# EAGLE board PCB_V0.3 (EAGLE 9.7.0)
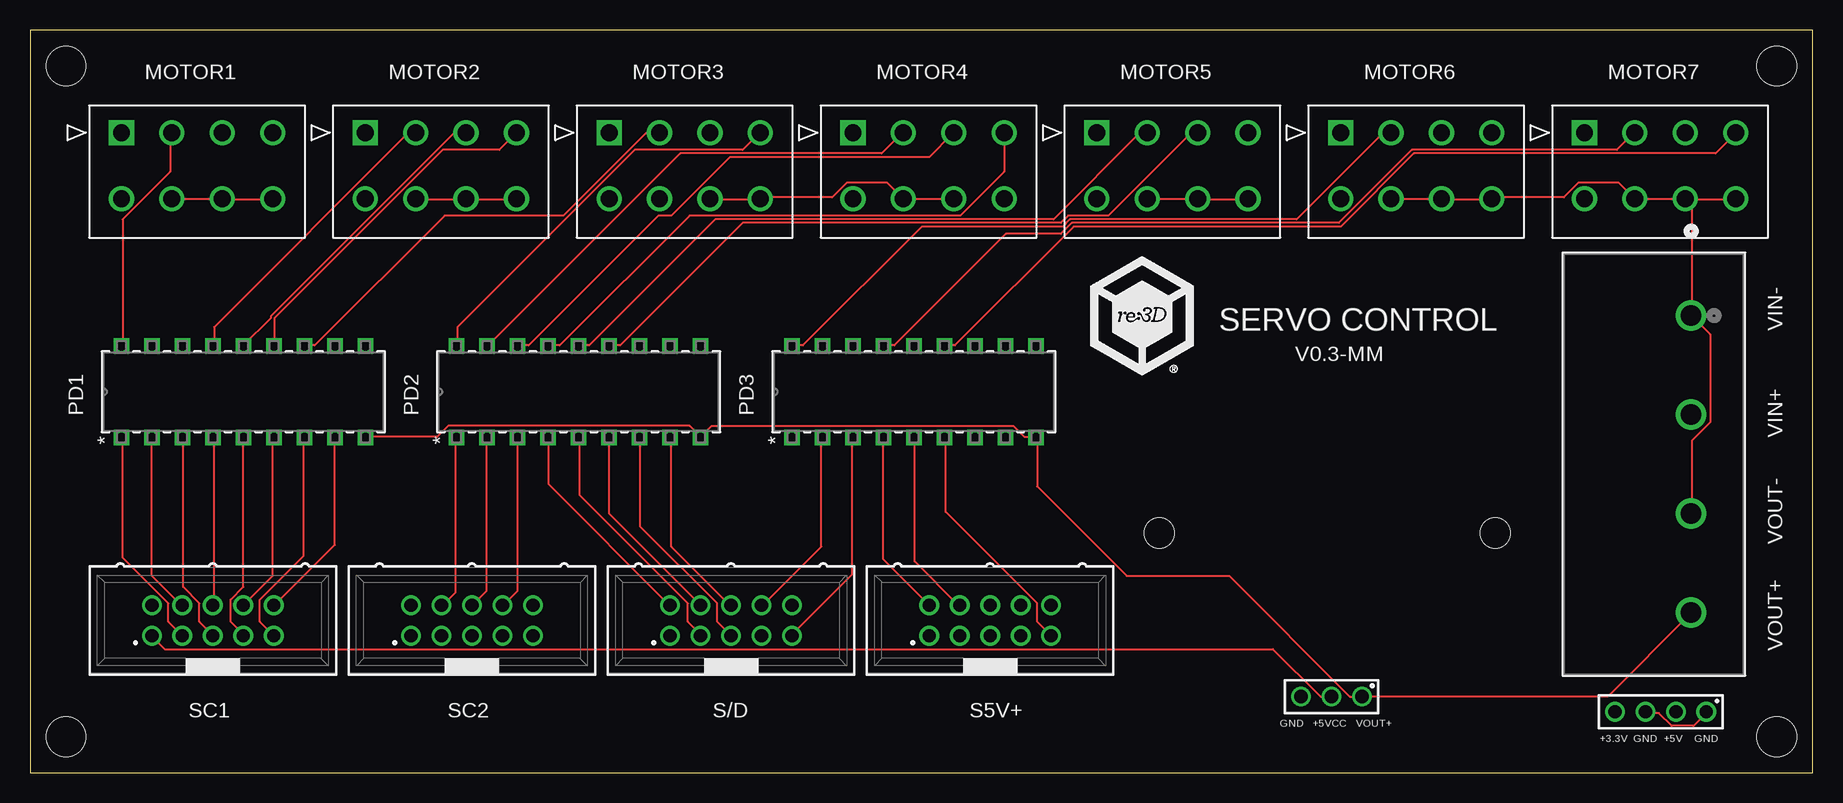
[diagram p0: board, top side]
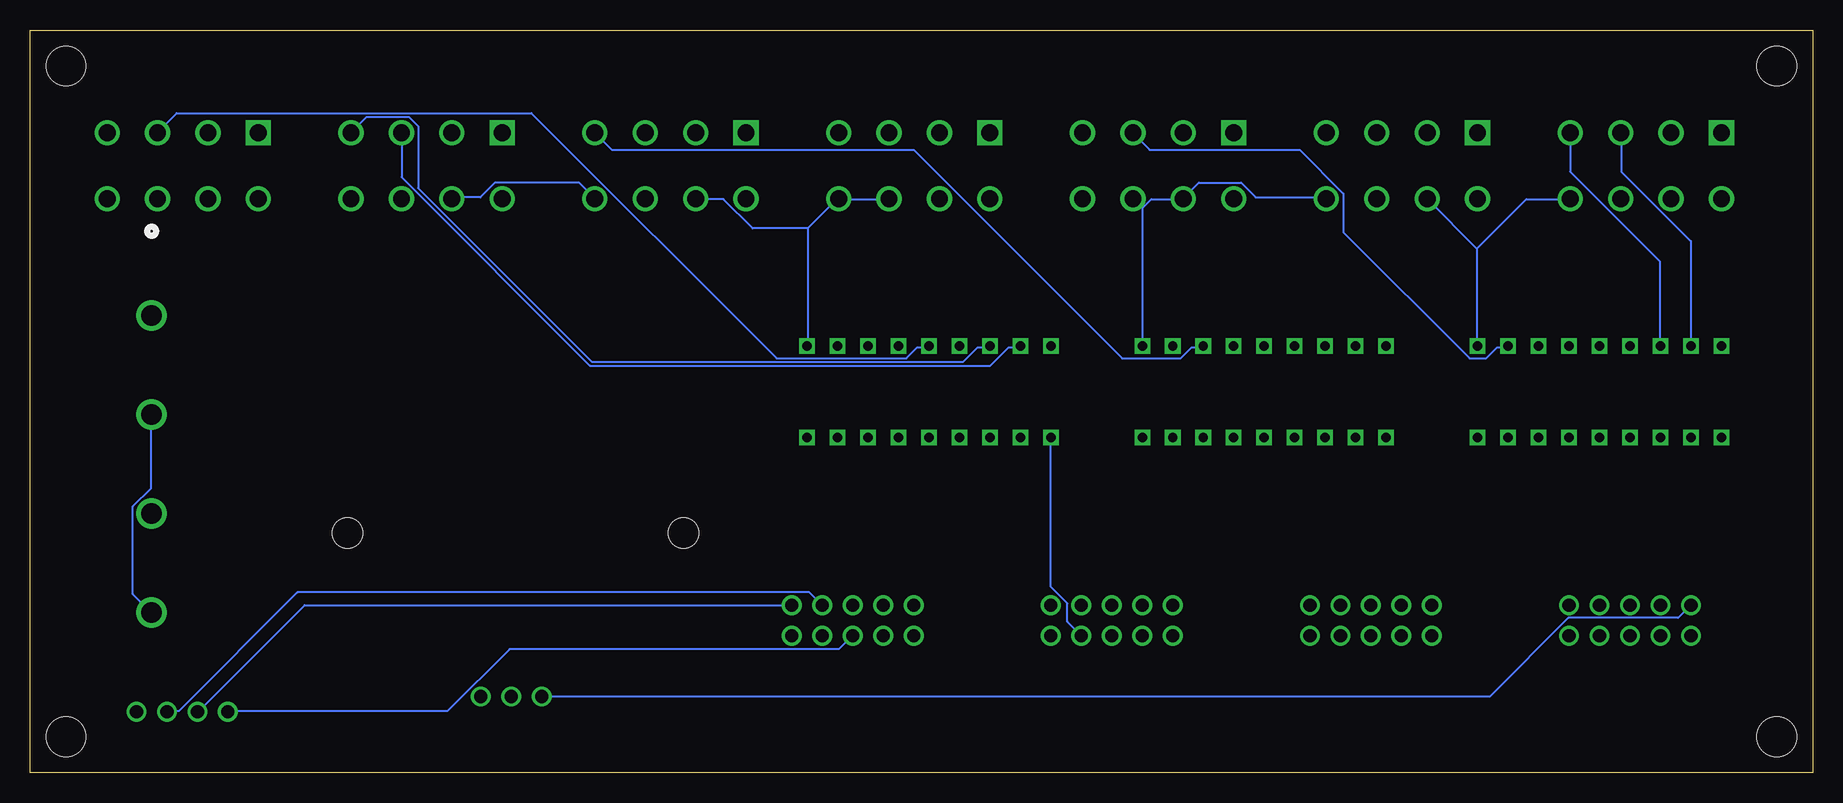
[diagram p1: board, bottom side, seen from below]

Size 148.57 x 61.9 mm. Coordinates in mm from the lower left corner, seen from the top.
Outline: 0,61.9 0,0 148.57,0 148.57,61.9 0,61.9
Copper layers (1*16): Top 0.035mm / dielectric 1.5mm / Bottom 0.035mm
Design rules "Fusion Electronics Design Rules": minimum track width 6mil, minimum drill 0.35mm, track to track 6mil, track to pad 6mil, pad to pad 6mil, via to via 6mil, smd to smd 6mil, copper to edge 40mil, drill to drill 6mil, minimum pad ring 10mil, minimum via ring 8mil, stop-mask expansion 4mil, vias tented up to drill 0mil, thermal gap 10mil
Holes 2.5 mm at 94.1,19.99 122.11,19.99
Holes 3.3 mm at 145.57,3 145.57,58.9 3,58.9 3,3
tRestrict: area 87.6,33 to 124.5,43.2; area 91.4,16.5 to 124.5,22.9
bRestrict: area 91.4,16.5 to 124.5,22.9

## Footprints (pad centres in the part's own frame; a part is rotated, then mirrored left to right if it is on the bottom)
61300311121 = drill 1.1: 1 -2.54,0; 2 0,0; 3 2.54,0
CONN_YK331040XX00G_AMP = drill 1.702 pad 2.21: 1 0,0; 2 8.25,0; 3 16.5,0; 4 24.75,0
61300411121 = drill 1.1: 1 -3.81,0; 2 -1.27,0; 3 1.27,0; 4 3.81,0
CON_1724470208 = drill 1.4 pad 1.9 square: 1 0,0 | drill 1.4 pad 1.9: 2 -4.2,0; 3 -8.4,0; 4 -12.6,0; 5 0,5.5; 6 -4.2,5.5; 7 -8.4,5.5; 8 -12.6,5.5
PDIP18_N_MCH = drill 0.787 pad 1.295 square: 1 0,0; 2 0,-2.54; 3 0,-5.08; 4 0,-7.62; 5 0,-10.16; 6 0,-12.7; 7 0,-15.24; 8 0,-17.78; 9 0,-20.32; 10 7.62,-20.32; 11 7.62,-17.78; 12 7.62,-15.24; 13 7.62,-12.7; 14 7.62,-10.16; 15 7.62,-7.62; 16 7.62,-5.08; 17 7.62,-2.54; 18 7.62,0
61201021621 = drill 1.1: 1 -5.08,-1.27; 2 -5.08,1.27; 3 -2.54,-1.27; 4 -2.54,1.27; 5 0,-1.27; 6 0,1.27; 7 2.54,-1.27; 8 2.54,1.27; 9 5.08,-1.27; 10 5.08,1.27

## Placement (x,y rotation side)
J8  61300311121  [61300311121]  108.46,6.35 180 top
J12  YK3310403000GCONN_YK331040XX00G_AMP  [CONN_YK331040XX00G_AMP]  138.43,38.1 270 top
J13  61300411121  [61300411121]  135.89,5.08 180 top
MOTOR1  1724470208CON_1724470208  [CON_1724470208]  7.62,53.34 180 top
MOTOR2  1724470208CON_1724470208  [CON_1724470208]  27.94,53.34 180 top
MOTOR3  1724470208CON_1724470208  [CON_1724470208]  48.26,53.34 180 top
MOTOR4  1724470208CON_1724470208  [CON_1724470208]  68.58,53.34 180 top
MOTOR5  1724470208CON_1724470208  [CON_1724470208]  88.9,53.34 180 top
MOTOR6  1724470208CON_1724470208  [CON_1724470208]  109.22,53.34 180 top
MOTOR7  1724470208CON_1724470208  [CON_1724470208]  129.54,53.34 180 top
PD1  MIC2981/82YNPDIP18_N_MCH  [PDIP18_N_MCH]  7.62,27.94 90 top
PD2  MIC2981/82YNPDIP18_N_MCH  [PDIP18_N_MCH]  35.56,27.94 90 top
PD3  MIC2981/82YNPDIP18_N_MCH  [PDIP18_N_MCH]  63.5,27.94 90 top
S5V+  61201021621  [61201021621]  80.01,12.7 0 top
S/D  61201021621  [61201021621]  58.42,12.7 0 top
SC1  61201021621  [61201021621]  15.24,12.7 0 top
SC2  61201021621  [61201021621]  36.83,12.7 0 top

## Library data of the parts
J8 = 6130XX11121_61300311121; DATASHEET-URL: https://www.we-online.com/redexpert/spec/61300311121?ae; GENDER: Pin Header; IR: 3A; MOUNT: THT; PACKAGING: Bag; PART-NUMBER: 61300311121; PINS: 3; PITCH: 2.54mm; ROWS: Single; TYPE: Straight
J12 = 2024-10-15_17-21-56_Library; COPYRIGHT: Copyright (C) 2024 Ultra Librarian. All rights reserved.; MANUFACTURER_PART_NUMBER: YK3310403000G; MFR_NAME: Amphenol ICC
J13 = 6130XX11121_61300411121; DATASHEET-URL: https://www.we-online.com/redexpert/spec/61300411121?ae; GENDER: Pin Header; IR: 3A; MOUNT: THT; PACKAGING: Bag; PART-NUMBER: 61300411121; PINS: 4; PITCH: 2.54mm; ROWS: Single; TYPE: Straight
MOTOR1-MOTOR7 = 2024-10-14_18-11-13_Library; COPYRIGHT: Copyright (C) 2024 Ultra Librarian. All rights reserved.; MANUFACTURER_PART_NUMBER: 1724470208; MFR_NAME: Molex Connector Corporation
PD1-PD3 = 2024-10-01_17-12-49_Library; COPYRIGHT: Copyright (C) 2024 Ultra Librarian. All rights reserved.; MANUFACTURER_PART_NUMBER: MIC2981/82YN; MFR_NAME: Micrel / Microchip Technology
S5V+ S/D SC1 SC2 = 6120XX21621_61201021621; CONTACT-RESISTANCE: 20mOhm; DATASHEET-URL: https://www.we-online.com/redexpert/spec/61201021621?ae; GENDER: Male; IR: 3A; LENGTH: 20.36mm; MOUNT: THT; PACKAGING: Tray; PART-NUMBER: 61201021621; PINS: 10; PITCH: 2.54mm; TYPE: Straight; WORKING-VOLTAGE: 250V(AC)

## Nets
+3.3VCC: J13.4 S5V+.5
+5VCC: J8.2 SC1.1
+5VCC1: J13.2 S5V+.8
A1+: MOTOR1.3 PD1.17
A2+: MOTOR2.3 PD1.14
A3+: MOTOR3.3 PD1.11
A4+: MOTOR4.3 PD2.16
A5+: MOTOR5.3 PD2.13
A6+: MOTOR6.3 PD3.17
A7+: MOTOR7.3 PD3.14
B1+: MOTOR1.2 PD1.18
B2+: MOTOR2.2 PD1.15
B3+: MOTOR3.2 PD1.12
B4+: MOTOR4.2 PD2.17
B5+: MOTOR5.2 PD2.14
B6+: MOTOR6.2 PD3.18
B7+: MOTOR7.2 PD3.15
EN1+: MOTOR1.4 PD1.16
EN2+: MOTOR2.4 PD1.13
EN3+: MOTOR3.4 PD2.18
EN4+: MOTOR4.4 PD2.15
EN5+: MOTOR5.4 PD2.12
EN6+: MOTOR6.4 PD3.16
EN7+: MOTOR7.4 PD3.13
GND: J12.1 J12.3 MOTOR1.6 MOTOR1.7 MOTOR1.8 MOTOR2.6 MOTOR2.7 MOTOR2.8 MOTOR3.6 MOTOR3.7 MOTOR3.8 MOTOR4.6 MOTOR4.7 MOTOR4.8 MOTOR5.6 MOTOR5.7 MOTOR5.8 MOTOR6.6 MOTOR6.7 MOTOR6.8 MOTOR7.6 MOTOR7.7 MOTOR7.8 PD1.10 PD2.10 PD3.10
GND1: J13.1 J13.3 S5V+.10
GND2: J8.3 SC1.2
PA0: PD1.4 SC1.6
PA1: PD1.2 SC1.4
PA3: PD2.2 SC2.6
PA5: PD1.7 SC1.9
PA8: PD3.5 S5V+.4
PA9: PD3.4 S5V+.2
PA28: PD1.3 SC1.5
PB2: PD1.6 SC1.8
PB3: PD2.7 S/D.5
PB6: PD2.4 S/D.2
PB8: PD2.6 S/D.4
PB12: PD1.8 SC1.10
PB13: PD1.5 SC1.7
PB22: PD2.5 S/D.3
PB24: PD3.1 S/D.7
PB25: PD2.1 SC2.4
PB26: PD3.3 S/D.9
PB27: PD2.3 SC2.8
PC2: PD1.1 SC1.3
PC8: PD3.6 S5V+.9
PD1: PD2.8 S/D.6
PD3: PD3.2 S/D.8
VIN+: J8.1 J12.2 J12.4 PD1.9 PD2.9 PD3.9

## Tracks (layer width: path | path; a pad name or v marks a point on that pad's centre or on a via)
+3.3VCC
  Bottom 0.152: J13.4 132.08,5.13 113.79,5.13 108.61,10.31 81.18,10.31 80.11,11.38 S5V+.5
+5VCC
  Top 0.152: J8.2 107.54,6.35 103.58,10.31 11.23,10.31 10.16,11.38 SC1.1
+5VCC1
  Bottom 0.152: S5V+.8 83.62,15.04 126.29,15.04 136.19,5.13 137.11,5.13 J13.2
A1+
  Bottom 0.152: PD1.17 10.16,44.3 15.95,50.09 15.95,53.29 MOTOR1.3
A2+
  Top 0.152: PD1.14 17.78,35.61 20.07,37.9 20.07,38.05 35.31,53.29 36.22,53.29 MOTOR2.3
A3+
  Bottom 0.152: PD1.11 25.4,35.46 26.31,35.46 27.23,34.54 28.6,34.54 39.12,45.06 39.12,48.26 42.77,51.92 55.27,51.92 56.64,53.29 MOTOR3.3
A4+
  Top 0.152: PD2.16 40.64,35.61 41.55,35.61 52.38,46.43 53.44,46.43 58.32,51.31 74.93,51.31 76.91,53.29 MOTOR4.3
A5+
  Top 0.152: PD2.13 48.26,35.61 49.17,35.61 59.39,45.82 85.9,45.82 86.51,46.43 89.86,46.43 96.72,53.29 97.18,53.29 MOTOR5.3
A6+
  Bottom 0.152: PD3.17 66.09,35.46 67,35.46 68.53,33.93 101.91,33.93 117.6,49.63 117.6,53.29 MOTOR6.3
A7+
  Bottom 0.152: PD3.14 73.71,35.46 74.62,35.46 75.54,34.54 86.36,34.54 106.78,54.97 136.35,54.97 137.87,53.44 MOTOR7.3
B1+
  Top 0.152: PD1.18 7.72,35.61 7.72,46.13 11.68,50.09 11.68,53.29 MOTOR1.2
B2+
  Top 0.152: PD1.15 15.34,35.61 15.34,37.13 31.5,53.29 32.11,53.29 MOTOR2.2
B3+
  Top 0.152: PD1.12 22.96,35.61 23.72,35.61 34.54,46.43 44.45,46.43 51.31,53.29 52.38,53.29 MOTOR3.2
B4+
  Top 0.152: PD2.17 38.2,35.61 54.2,51.61 70.97,51.61 72.64,53.29 MOTOR4.2
B5+
  Top 0.152: PD2.14 45.82,35.61 46.58,35.61 57.1,46.13 85.29,46.13 92.46,53.29 93.07,53.29 MOTOR5.2
B6+
  Top 0.152: PD3.18 63.5,35.61 64.41,35.61 74.32,45.52 86.05,45.52 86.67,46.13 105.56,46.13 112.72,53.29 113.33,53.29 MOTOR6.2
B7+
  Top 0.152: PD3.15 71.12,35.61 72.03,35.61 81.33,44.91 85.9,44.91 86.82,45.82 109.07,45.82 115.16,51.92 132.23,51.92 133.6,53.29 MOTOR7.2
EN1+
  Bottom 0.152: PD1.16 12.75,35.61 12.75,42.62 20.22,50.09 20.22,53.29 MOTOR1.4
EN2+
  Top 0.152: PD1.13 20.37,35.61 20.37,37.9 34.39,51.92 39.12,51.92 40.49,53.29 MOTOR2.4
EN3+
  Top 0.152: PD2.18 35.61,35.61 35.61,37.13 50.39,51.92 59.39,51.92 60.76,53.29 MOTOR3.4
EN4+
  Top 0.152: PD2.15 43.23,35.61 44.14,35.61 54.97,46.43 77.52,46.43 81.18,50.09 81.18,53.29 MOTOR4.4
EN5+
  Bottom 0.152: PD2.12 50.85,35.46 51.77,35.46 52.68,34.54 57.56,34.54 74.93,51.92 100.08,51.92 101.45,53.29 MOTOR5.4
EN6+
  Bottom 0.152: PD3.16 68.68,35.46 69.6,35.46 70.81,34.24 101.75,34.24 116.23,48.72 116.23,53.9 116.99,54.66 120.5,54.66 121.72,53.44 MOTOR6.4
EN7+
  Top 0.152: PD3.13 76.3,35.61 77.06,35.61 86.97,45.52 109.22,45.52 115.32,51.61 140.46,51.61 142.14,53.29 MOTOR7.4
GND
  Top 0.152: J12.3 138.48,21.74 138.48,27.69 140,29.21 140,36.52 J12.1 138.48,38.2 138.48,47.8 | MOTOR6.6 113.49,47.8 117.6,47.8 MOTOR6.7 117.75,47.8 121.72,47.8 MOTOR6.8 121.87,47.95 127.81,47.95 129.03,49.17 132.38,49.17 133.6,47.95 MOTOR7.6 133.76,47.8 137.87,47.8 MOTOR7.7 | 138.48,47.8 138.02,47.8 MOTOR7.7 | 138.48,47.8 142.14,47.8 MOTOR7.8 | 138.48,47.8 MOTOR7.7 | MOTOR1.6 11.84,47.8 15.95,47.8 MOTOR1.7 16.1,47.8 20.22,47.8 MOTOR1.8 | MOTOR2.6 32.26,47.8 36.22,47.8 MOTOR2.7 36.37,47.8 40.49,47.8 MOTOR2.8 | MOTOR3.7 56.79,47.8 60.76,47.8 MOTOR3.8 60.91,47.95 66.85,47.95 68.07,49.17 71.42,49.17 72.64,47.95 MOTOR4.6 72.8,47.8 76.91,47.8 MOTOR4.7 | MOTOR5.6 93.22,47.8 97.18,47.8 MOTOR5.7 97.33,47.8 101.45,47.8 MOTOR5.8
  Bottom 0.152: 27.99,43.69 27.99,35.61 PD1.10 | 27.99,43.69 32.11,47.8 MOTOR2.6 | 27.99,43.69 23.88,47.8 20.37,47.8 MOTOR1.8 | 55.88,47.04 PD2.10 | 55.88,47.04 56.64,47.8 MOTOR3.7 | 55.88,47.04 55.12,47.8 52.53,47.8 MOTOR3.6 52.38,47.95 51.16,49.17 47.65,49.17 46.43,47.95 40.64,47.95 MOTOR2.8 | 83.77,45.36 83.77,35.61 PD3.10 | 83.77,45.36 81.33,47.8 MOTOR4.8 81.18,47.8 77.06,47.8 MOTOR4.7 | 83.77,45.36 88.34,45.36 90.78,47.8 93.07,47.8 MOTOR5.6 | MOTOR6.6 113.33,47.95 111.05,47.95 109.83,49.17 102.82,49.17 101.6,47.95 MOTOR5.8
GND1
  Top 0.152: J13.3 134.67,4.98 135.74,4.98 136.8,3.91 138.63,3.91 139.7,4.98 J13.1
  Bottom 0.152: S5V+.10 125.68,13.97 134.52,5.13 J13.3
GND2
  Bottom 0.152: J8.3 26.92,6.35 20.37,12.9 11.23,12.9 SC1.2
PA0
  Top 0.152: PD1.4 15.34,27.84 15.34,13.97 SC1.6
PA1
  Top 0.152: PD1.2 10.16,16.41 12.6,13.97 SC1.4
PA3
  Top 0.152: SC2.6 38.05,15.19 38.05,27.84 PD2.2
PA5
  Top 0.152: SC1.9 19.15,12.6 19.15,14.43 22.81,18.09 22.81,27.84 PD1.7
PA8
  Top 0.152: PD3.5 73.71,27.84 73.71,17.63 77.37,13.97 S5V+.4
PA9
  Top 0.152: PD3.4 71.12,17.78 S5V+.2
PA28
  Top 0.152: PD1.3 12.75,27.84 12.75,15.49 14.12,14.12 14.12,12.6 15.19,11.53 SC1.5
PB2
  Top 0.152: SC1.8 20.22,16.41 20.22,27.84 PD1.6
PB3
  Top 0.152: S/D.5 57.25,12.6 57.25,14.12 50.85,20.52 50.85,27.84 PD2.7
PB6
  Top 0.152: PD2.4 43.23,27.84 43.23,24.03 53.29,13.97 S/D.2
PB8
  Top 0.152: PD2.6 48.26,21.59 S/D.4
PB12
  Top 0.152: PD1.8 25.4,19 20.37,13.97 SC1.10
PB13
  Top 0.152: PD1.5 17.78,15.49 16.71,14.43 16.71,12.6 17.78,11.53 SC1.7
PB22
  Top 0.152: PD2.5 45.82,27.84 45.82,23.11 54.81,14.12 54.81,12.6 55.88,11.53 S/D.3
PB24
  Bottom 0.152: PD3.1 63.5,15.49 62.13,14.12 62.13,12.6 S/D.7
PB25
  Top 0.152: PD2.1 35.46,27.84 35.46,15.04 34.39,13.97 SC2.4
PB26
  Top 0.152: PD3.3 68.53,27.84 68.53,16.56 63.5,11.53 S/D.9
PB27
  Top 0.152: PD2.3 40.64,15.19 39.42,13.97 SC2.8
PC2
  Top 0.152: SC1.3 11.53,12.6 11.53,14.12 7.72,17.93 7.72,27.84 PD1.1
PC8
  Top 0.152: S5V+.9 83.92,12.6 83.92,14.12 76.3,21.74 76.3,27.84 PD3.6
PD1
  Top 0.152: PD2.8 53.44,27.84 53.44,18.85 58.32,13.97 S/D.6
PD3
  Top 0.152: PD3.2 65.94,27.84 65.94,18.85 61.06,13.97 S/D.8
VIN+
  Top 0.152: J12.4 138.33,13.21 131.47,6.35 J8.1 109.98,6.35 99.92,16.41 91.39,16.41 83.92,23.88 83.92,27.84 PD3.9 83.77,27.99 82.86,27.99 81.94,28.91 56.79,28.91 55.88,27.99 | 55.88,27.99 54.97,28.91 34.85,28.91 33.93,27.99 27.99,27.99 PD1.9 | 55.88,27.99 PD2.9
  Bottom 0.152: J12.2 138.48,29.82 138.48,23.72 140,22.2 140,14.88 138.48,13.36 J12.4

## Text on the board
tPlace: SERVO CONTROL | VIN- | V0.3-MM | VIN+ | VOUT- | VOUT+ | GND | +5VCC | VOUT+ | +3.3V | GND | +5V | GND